# EAGLE board LPmini-Prototype (EAGLE 6.4)
REV: B
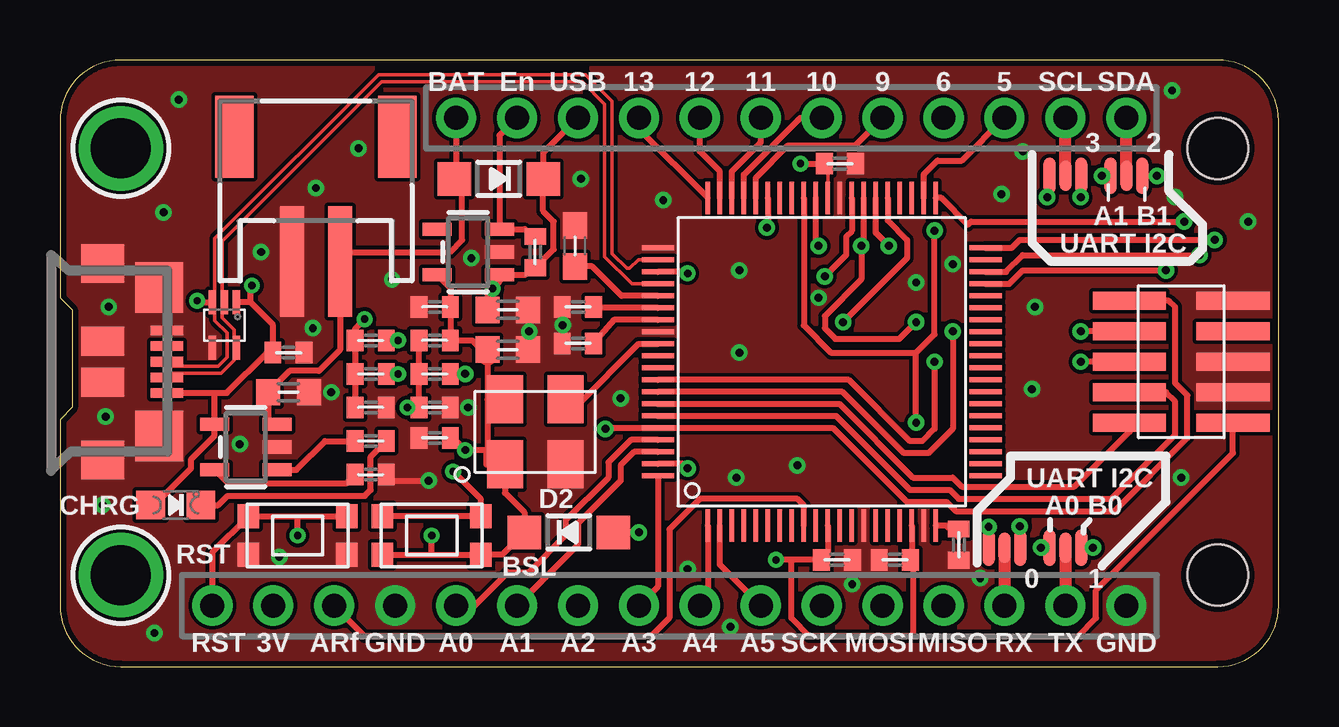
[diagram p0: board, top side]
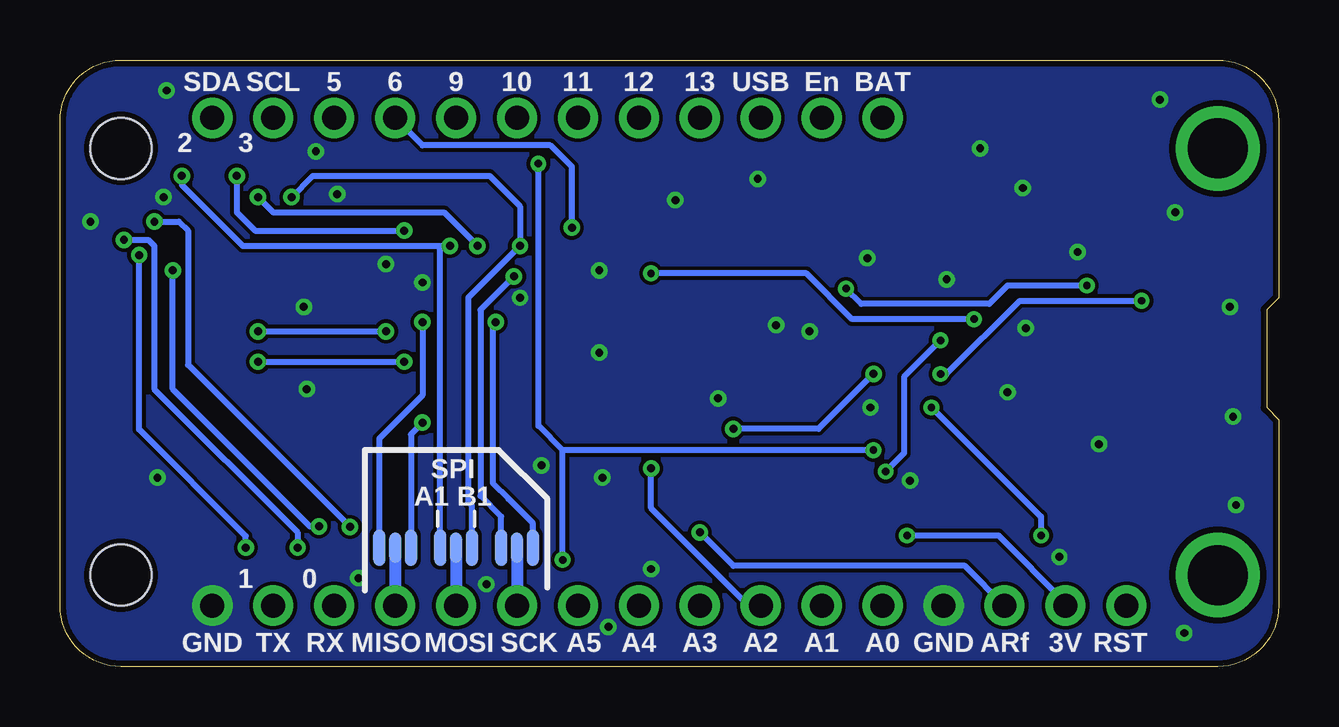
[diagram p1: board, bottom side, seen from below]

Size 50.8 x 25.27 mm. Coordinates in mm from the lower left corner, seen from the top.
Outline: 48.26,0 arc90 50.8,2.54 50.8,22.73 arc90 48.26,25.27 2.54,25.27 arc90 0,22.73 0,15.37 0.51,14.86 0.51,10.79 0,10.29 0,2.54 arc90 2.54,0 48.26,0
Copper layers (1*16): Top 0.0356mm / dielectric 1.5011mm / Bottom 0.0356mm
Design rules "Joseph *": minimum track width 6mil, minimum drill 12mil, track to track 6mil, track to pad 6mil, pad to pad 6mil, via to via 6mil, smd to smd 0mil, copper to edge 10mil, drill to drill 6mil, minimum pad ring 7mil, minimum via ring 7mil, stop-mask expansion 1mil, vias tented up to drill 50mil, thermal gap 6mil
Holes 2.54 mm at 48.26,21.59 48.26,3.81

## Footprints (pad centres in the part's own frame; a part is rotated, then mirrored left to right if it is on the bottom)
PB_KMR2 = smd 0.9 x 1: 1A -2.05,0.8; 1B 2.05,0.8; 2A -2.05,-0.8; 2B 2.05,-0.8
C0402 = smd 0.7 x 0.9: 1 -0.65,0; 2 0.65,0
R0603 = smd 1 x 1.1: 1 -0.85,0; 2 0.85,0
R0402 = smd 0.7 x 0.9: 1 -0.65,0; 2 0.65,0
C0603 = smd 1.1 x 1: 1 -0.85,0; 2 0.85,0
CHIPLED_0805_NOOUTLINE = smd 1.2 x 1.2: A 0,-1.05; C 0,1.05
SOD-123 = smd 1.4 x 1.4: A 1.85,0; C -1.85,0
1X16_ROUND = drill 1 pad 1.676: 1 -19.05,0; 2 -16.51,0; 3 -13.97,0; 4 -11.43,0; 5 -8.89,0; 6 -6.35,0; 7 -3.81,0; 8 -1.27,0; 9 1.27,0; 10 3.81,0; 11 6.35,0; 12 8.89,0; 13 11.43,0; 14 13.97,0; 15 16.51,0; 16 19.05,0
1X12_ROUND = drill 1 pad 1.676: 1 -13.97,0; 2 -11.43,0; 3 -8.89,0; 4 -6.35,0; 5 -3.81,0; 6 -1.27,0; 7 1.27,0; 8 3.81,0; 9 6.35,0; 10 8.89,0; 11 11.43,0; 12 13.97,0
PROJECT7264_TPD2E001-DRL = smd 0.3 x 1: 1 -0.5,-0.95; 2 0,-0.95; 3 0.5,-0.95; 4 0.5,0.95; 5 -0.5,0.95
SOT23-5 = smd 0.55 x 1.2: 1 -0.95,-1.3; 2 0,-1.3; 3 0.95,-1.3; 4 0.95,1.3; 5 -0.95,1.3
SOLDER_JUMPER_3 = smd 0.508 x 1.524: 1 -0.66,0; 2 0.66,0 | smd 0.508 x 1.27: C 0,0
2X05-SMALL_SMD = smd 0.762 x 3.048: 1 -2.54,-2.159; 2 -1.27,-2.159; 3 0,-2.159; 4 1.27,-2.159; 5 2.54,-2.159; 6 2.54,2.159; 7 1.27,2.159; 8 0,2.159; 9 -1.27,2.159; 10 -2.54,2.159
TI_MSP430_V16_INTERN_PN80 = smd 1.35 x 0.2: 1 -6.825,4.75; 2 -6.825,4.25; 3 -6.825,3.75; 4 -6.825,3.25; 5 -6.825,2.75; 6 -6.825,2.25; 7 -6.825,1.75; 8 -6.825,1.25; 9 -6.825,0.75; 10 -6.825,0.25; 11 -6.825,-0.25; 12 -6.825,-0.75; 13 -6.825,-1.25; 14 -6.825,-1.75; 15 -6.825,-2.25; 16 -6.825,-2.75; 17 -6.825,-3.25; 18 -6.825,-3.75; 19 -6.825,-4.25; 20 -6.825,-4.75; 41 6.825,-4.75; 42 6.825,-4.25; 43 6.825,-3.75; 44 6.825,-3.25; 45 6.825,-2.75; 46 6.825,-2.25; 47 6.825,-1.75; 48 6.825,-1.25; 49 6.825,-0.75; 50 6.825,-0.25; 51 6.825,0.25; 52 6.825,0.75; 53 6.825,1.25; 54 6.825,1.75; 55 6.825,2.25; 56 6.825,2.75; 57 6.825,3.25; 58 6.825,3.75; 59 6.825,4.25; 60 6.825,4.75 | smd 0.2 x 1.35: 21 -4.75,-6.825; 22 -4.25,-6.825; 23 -3.75,-6.825; 24 -3.25,-6.825; 25 -2.75,-6.825; 26 -2.25,-6.825; 27 -1.75,-6.825; 28 -1.25,-6.825; 29 -0.75,-6.825; 30 -0.25,-6.825; 31 0.25,-6.825; 32 0.75,-6.825; 33 1.25,-6.825; 34 1.75,-6.825; 35 2.25,-6.825; 36 2.75,-6.825; 37 3.25,-6.825; 38 3.75,-6.825; 39 4.25,-6.825; 40 4.75,-6.825; 61 4.75,6.825; 62 4.25,6.825; 63 3.75,6.825; 64 3.25,6.825; 65 2.75,6.825; 66 2.25,6.825; 67 1.75,6.825; 68 1.25,6.825; 69 0.75,6.825; 70 0.25,6.825; 71 -0.25,6.825; 72 -0.75,6.825; 73 -1.25,6.825; 74 -1.75,6.825; 75 -2.25,6.825; 76 -2.75,6.825; 77 -3.25,6.825; 78 -3.75,6.825; 79 -4.25,6.825; 80 -4.75,6.825
MOUNTINGHOLE_2.5_PLATED = drill 2.5 pad 3.2: P$1 0,0
USB_CON-UPDATE_HIROSE-ZX62R-B-5P = smd 1.35 x 0.4: D+ 2.675,0; D- 2.675,-0.65; GND 2.675,1.3; NC 2.675,0.65; VBUS 2.675,-1.3 | smd 1.778 x 1.6: SHIELD1 0,4.1; SHIELD2 0,-4.1 | smd 2 x 2.1: SHIELD3 2.35,3.1; SHIELD4 2.35,-3.1 | smd 1.778 x 1.2: SHIELD5 0,0.85; SHIELD6 0,-0.85
JSTPH2 = smd 1 x 4.6: 1 -1,-3.7; 2 1,-3.7 | smd 1.6 x 3.4: NC1 -3.4,1.5; NC2 3.4,1.5
SMD_CRYSTAL_3.2X5_PERICOM = smd 1.5 x 2: 1 -1.27,-1.35; 2 1.27,-1.35; 3 1.27,1.35; 4 -1.27,1.35

## Placement (x,y rotation side)
BSL  PB_SMALL_SMD  [PB_KMR2]  15.49,5.46 180 top
C1  .1uF  [C0402]  9.53,13.08 0 top
C3  10µF  [R0603]  9.53,11.43 0 top
C6  10µF  [R0603]  18.67,14.86 0 top
C7  1uF  [R0402]  15.62,14.99 180 top
C8  10µF  [R0603]  18.67,13.21 0 top
C19  .1uF  [C0402]  15.62,10.79 0 top
C20  0.1uF  [C0402]  15.62,9.53 180 top
C21  .1uF  [C0402]  32.51,20.95 0 top
C22  .1uF  [C0402]  32.38,4.45 0 top
C23  .1uF  [C0402]  34.8,4.45 180 top
C24  10uF  [C0603]  21.46,17.53 90 top
C25  .1uF  [C0402]  21.59,14.99 180 top
C26  .1uF  [C0402]  21.59,13.46 180 top
C28  .1uF  [C0402]  37.47,5.08 270 top
CHG  ORANGE  [CHIPLED_0805_NOOUTLINE]  4.83,6.73 270 top
D2  MBR120  [SOD-123]  21.21,5.59 0 top
D4  MBR120  [SOD-123]  18.29,20.32 180 top
JP1  [1X16_ROUND]  25.4,2.54 180 top
JP3  [1X12_ROUND]  30.48,22.86 0 top
R1  1.4k  [R0402]  12.95,12.19 0 top
R2  1K  [R0402]  12.95,9.4 180 top
R3  1M  [R0402]  12.95,10.79 180 top
R4  1k  [R0402]  15.62,12.19 0 top
R5  100  [R0402]  12.95,13.59 0 top
R7  22k  [R0402]  15.62,13.59 180 top
R8  10K\  [R0402]  12.95,8 0 top
R9  100k  [R0402]  19.81,17.27 90 top
RST  PB_SMALL_SMD  [PB_KMR2]  9.91,5.46 180 top
U1  ESD_TPD2E001  [PROJECT7264_TPD2E001-DRL]  6.86,14.22 180 top
U2  SPX3819-3.3  [SOT23-5]  17.02,17.27 90 top
U3  MCP73831T-2ACI/OT  [SOT23-5]  7.75,9.14 90 top
U$2  3PT_SOLDER_JUMPER  [SOLDER_JUMPER_3]  39.37,4.95 180 top
U$4  3PT_SOLDER_JUMPER  [SOLDER_JUMPER_3]  34.29,4.95 0 bottom
U$5  3PT_SOLDER_JUMPER  [SOLDER_JUMPER_3]  36.83,4.95 0 bottom
U$6  3PT_SOLDER_JUMPER  [SOLDER_JUMPER_3]  31.75,4.95 0 bottom
U$7  PINHD_2X05SMD  [2X05-SMALL_SMD]  46.74,12.7 90 top
U$8  3PT_SOLDER_JUMPER  [SOLDER_JUMPER_3]  41.91,4.95 180 top
U$9  3PT_SOLDER_JUMPER  [SOLDER_JUMPER_3]  44.45,20.45 180 top
U$10  3PT_SOLDER_JUMPER  [SOLDER_JUMPER_3]  41.91,20.45 180 top
U$12  TI_MSP430_V16_INTERN_F552X---PN80  [TI_MSP430_V16_INTERN_PN80]  31.75,12.7 90 top
U$31  MOUNTINGHOLE2.5  [MOUNTINGHOLE_2.5_PLATED]  2.54,21.59 270 top
U$32  MOUNTINGHOLE2.5  [MOUNTINGHOLE_2.5_PLATED]  2.54,3.81 270 top
USB1  [USB_CON-UPDATE_HIROSE-ZX62R-B-5P]  1.78,12.7 0 top
X1  JSTPH  [JSTPH2]  10.67,20.57 0 top
X2  16MHZ  [SMD_CRYSTAL_3.2X5_PERICOM]  19.81,9.78 0 top

## Library data of the parts
BSL RST U1 U$2 U$4-U$10 U$12 USB1 X2 = 0Joseph
C1 C3 C6 C7 C19-C26 C28 R1-R5 R7-R9 = rcl
C8 = rcl; COMPANY: ADAFRUIT INDUSTRIES; DRAWN: KTOWN; REV: A
CHG D2 D4 JP1 JP3 U2 U3 X1 = microbuilder
U$31 U$32 = microbuilder; BOM: EXCLUDE

## Nets
5: JP3.10 U$12.42
6: JP3.9 U$12.55
9: JP3.8 U$12.56
10: JP3.7 U$12.57
11: JP3.6 U$12.58
12: JP3.5 U$12.59
13: JP3.4 U$12.60
+5V: C24.1 U$12.65
A0: JP1.12 U$12.77
A0_RX: U$2.2 U$12.41
A0_TX: U$8.2 U$12.40
A1: JP1.11 U$12.78
A1_RX: U$5.2 U$9.2 U$12.52
A1_SCK: U$6.2 U$12.45
A1_TX: U$4.2 U$10.2 U$12.51
A2: JP1.10 U$12.79
A3: JP1.9 U$12.80
A4: JP1.8 U$12.1
A5: JP1.7 U$12.2
B0_SCL: U$8.1 U$12.38
B0_SDA: U$2.1 U$12.37
B1_SCK: U$6.1 U$12.48
B1_SCL: U$5.1 U$10.1 U$12.47
B1_SDA: U$4.1 U$9.1 U$12.46
D_N: U1.2 U1.5 U$12.64 USB1.D-
D_P: R1.2 U1.3 U$12.62 USB1.D+
EN: JP3.2 R9.2 U2.3
GND: C1.2 C3.2 C6.2 C7.2 C8.2 C19.2 C20.2 C21.2 C22.2 C23.2 C24.2 C25.2 C26.2 C28.2 JP1.1 JP1.13 R3.1 R8.2 RST.1A RST.1B U1.4 U2.2 U3.2 U$7.2 U$7.3 U$7.5 U$12.14 U$12.19 U$12.49 U$12.61 U$12.68 USB1.GND USB1.SHIELD1 USB1.SHIELD2 USB1.SHIELD3 USB1.SHIELD4 USB1.SHIELD5 USB1.SHIELD6 X1.1 X2.2
MISO: JP1.4 U$5.C
MOSI: JP1.5 U$4.C
N$1: CHG.C R2.1
N$3: R2.2 U3.1
N$4: R8.1 U3.5
N$5: BSL.2A BSL.2B R5.2
N$6: R1.1 R3.2 R5.1 U$12.63
N$14: U$12.39
N$23: C25.1 U$12.66
N$24: C26.1 U$12.67
N$25: C28.1 U$12.20
N$40: U$12.69 X2.3
RDA: JP1.3 U$2.C
RDB: JP3.12 U$9.C
RST: R4.2 U$7.6 U$12.76
RST_BTN: C19.1 JP1.16 R4.1 R7.2 RST.2A RST.2B
SCK: JP1.6 U$6.C
TCA: JP1.2 U$8.C
TCB: JP3.11 U$10.C
TCK: U$7.9 U$12.75
TDI: U$7.7 U$12.73
TDO: U$7.8 U$12.72
TMS: U$7.10 U$12.74
VBAT: C3.1 D4.A JP3.1 U3.3 X1.2
VBUS: C1.1 C6.1 CHG.A D4.C JP3.3 R9.1 U1.1 U2.1 U3.4 USB1.VBUS
VCC: BSL.1A BSL.1B C7.1 C8.1 C20.1 C21.1 C22.1 C23.1 D2.C JP1.15 R7.1 U2.5 U$7.1 U$12.11 U$12.18 U$12.50 X2.1 X2.4
VREF+: D2.A JP1.14 U$12.9

## Tracks (layer width: path | path; a pad name or v marks a point on that pad's centre or on a via)
5
  Top 0.254: U$12.42 36,20.51 36.58,21.08 37.59,21.08 JP3.10
6  (via drill 0.33)
  Top 0.254: U$12.55 29.5,18.32 v29.46,18.29
  Bottom 0.254: v29.46,18.29 29.46,20.83 30.35,21.72 35.69,21.72 JP3.9
9
  Top 0.254: U$12.56 29,20.36 30.35,21.72 33.15,21.72 JP3.8
10
  Top 0.254: U$12.57 28.5,20.5 30.86,22.86 JP3.7
11
  Top 0.254: U$12.58 28,20.63 29.21,21.84 JP3.6
12
  Top 0.254: U$12.59 27.5,20.63 26.67,21.46 JP3.5
13
  Top 0.254: U$12.60 24.13,22.39 JP3.4
+5V
  Top 0.254: U$12.65 23.41,15.45 22.19,16.68 C24.1
A0
  Top 0.254: U$12.77 23.8,9.45 22.86,8.51 22.86,7.87 21.08,6.1 21.08,5.46 19.56,3.94 18.67,3.94 17.27,2.54 JP1.12
A0_RX  (via drill 0.33)
  Top 0.254: v38.71,5.82 U$2.2 | U$12.41 36.74,19.52 37.85,18.41 37.97,18.54 v46.86,18.54
  Bottom 0.254: v38.71,5.82 45.47,12.57 45.47,18.16 45.85,18.54 v46.86,18.54
A0_TX  (via drill 0.33)
  Top 0.254: U$12.40 39.67,17.45 40.01,17.78 v48.13,17.78 | 41.27,4.98 U$8.2 v40.89,4.95
  Bottom 0.254: v48.13,17.78 47.12,17.78 46.86,17.53 46.86,11.56 40.89,5.59 v40.89,4.95
A1
  Top 0.254: U$12.78 23.94,8.95 23.37,8.38 23.37,7.75 21.59,5.97 21.59,5.08 JP1.11
A1_RX  (via drill 0.33)
  Top 0.254: 35.69,13.08 32.13,13.08 31,14.21 U$12.52 | 35.69,13.08 36.45,13.84 v36.45,18.16 | v35.69,10.16 35.69,13.08 | U$9.2 v43.43,20.45
  Bottom 0.254: 36.2,4.98 U$5.2 36.17,9.68 v35.69,10.16 | v36.45,18.16 42.67,18.16 43.43,18.92 v43.43,20.45
A1_SCK  (via drill 0.33)
  Top 0.254: U$12.45 34.5,18.59 35.31,17.78 35.31,17.02 v32.64,14.35
  Bottom 0.254: U$6.2 31.09,5.97 32.11,6.98 32.77,7.64 32.77,14.22 v32.64,14.35
A1_TX  (via drill 0.33)
  Top 0.254: v31.62,17.53 31.5,17.65 U$12.51 | U$10.2 41.25,19.58 v41.15,19.56
  Bottom 0.254: U$4.2 33.63,6.71 33.78,6.86 33.78,15.37 v31.62,17.53 31.62,19.18 32.89,20.45 40.26,20.45 v41.15,19.56
A2  (via drill 0.33)
  Top 0.254: v26.16,8.26 25.97,8.45 U$12.79
  Bottom 0.254: JP1.10 22.1,2.54 26.16,6.6 v26.16,8.26
A3
  Top 0.254: U$12.80 24.93,3.33 JP1.9
A4
  Top 0.254: U$12.1 27,2.87 JP1.8
A5
  Top 0.254: JP1.7 27.5,4.25 U$12.2
B0_SCL  (via drill 0.33)
  Top 0.254: U$12.38 39.44,16.45 40.13,17.14 v47.5,17.14 | 42.55,4.98 U$8.1 v43.05,4.95
  Bottom 0.254: v47.5,17.14 47.5,9.88 43.05,5.44 v43.05,4.95
B0_SDA  (via drill 0.33)
  Top 0.254: U$12.37 39.57,15.95 40.13,16.51 v46.1,16.51 | U$2.1 40.01,4.98 v40.01,5.84
  Bottom 0.254: v46.1,16.51 46.1,11.56 40.39,5.84 v40.01,5.84
B1_SCK  (via drill 0.33)
  Top 0.254: U$12.48 33,18.14 32.77,17.91 32.77,17.14 v31.88,16.26
  Bottom 0.254: U$6.1 32.41,6.25 33.27,7.11 33.27,14.86 v31.88,16.26
B1_SCL  (via drill 0.33)
  Top 0.254: U$12.47 33.5,17.68 v33.4,17.53 33.4,16.13 31.88,14.61 31.88,14.1 32.32,13.65 34.99,13.65 v35.69,14.35 | U$10.1 42.57,19.58 v42.55,19.56
  Bottom 0.254: v33.4,17.53 34.8,18.92 40.64,18.92 41.91,18.92 v42.55,19.56 | v35.69,14.35 35.69,11.3 37.49,9.5 U$5.1
B1_SDA  (via drill 0.33)
  Top 0.254: v34.54,17.53 34,18.07 U$12.46 | U$9.1 v45.72,20.45
  Bottom 0.254: U$4.1 34.95,17.53 v34.54,17.53 43.18,17.53 45.72,20.07 v45.72,20.45
D_N
  Top 0.152: U$12.64 23.84,15.95 22.71,17.08 22.71,23.43 21.78,24.36 13.4,24.36 6.76,17.72 6.76,15.3 U1.2 6.76,15.2 6.76,14.54 7.26,14.03 7.26,13.39 | USB1.D- 4.62,12.22 6.72,12.22 7.26,12.76 7.26,13.39 | U1.5 7.28,13.4 7.26,13.39
D_P  (via drill 0.3)
  Top 0.152: USB1.D+ 4.63,12.52 6.59,12.52 6.96,12.89 6.96,13.91 6.45,14.41 6.45,15.21 U1.3 6.45,15.3 6.45,17.84 13.27,24.66 21.91,24.66 23.01,23.56 23.01,17.21 23.63,16.59 23.75,16.59 24.11,16.95 U$12.62 | R1.2 v14.1,12.19
  Top 0.254: v5.71,15.24 5.78,15.17 U1.3
  Bottom 0.254: v5.71,15.24 10.79,15.24 13.84,12.19 v14.1,12.19
EN
  Top 0.254: R9.2 19.37,18.22 U2.3 18.32,22.13 JP3.2
GND  (via drill 0.33)
  Top 0.254: R8.2 13.86,7.75 v15.37,7.75
  other vias: 21.72,20.32 20.95,14.22 19.56,13.97 8.38,17.27 10.67,19.94 12.45,21.59 10.54,14.1 33.02,3.43 27.94,1.65 38.35,3.68 40.51,11.56 40.64,14.99 37.21,16.76 46.48,19.56 46.35,24 49.53,18.54 30.73,8.38 28.19,7.87 26.16,4.06 23.37,11.18 28.32,13.08 28.32,16.51 25.15,19.43 4.32,18.92 11.3,11.43 17.02,10.79 7.49,9.27 1.78,6.73 9.14,4.57 17.14,17.02 13.84,16.13 4.95,23.62 3.94,1.4 40.13,21.46 46.74,7.87 2.03,14.99 1.91,10.41 39.24,19.68 35.69,16 31.62,15.37
  pour Top (no thermals): 0,25.27 0,-2.67 50.8,-2.67 50.8,25.27
  pour Bottom (no thermals): 0,-2.67 50.8,-2.67 50.8,25.27 0,25.27
MISO
  Bottom 0.508: U$5.C JP1.4
MOSI
  Bottom 0.508: U$4.C JP1.5
N$1
  Top 0.254: CHG.C 6.6,6.73 6.99,7.11 12.7,7.11 12.95,7.37 12.95,8.75 R2.1
N$3
  Top 0.254: U3.1 9.85,8.19 11.05,9.4 R2.2
N$4
  Top 0.254: R8.1 11.92,7.62 7.02,7.62 U3.5
N$5  (via drill 0.3)
  Top 0.254: BSL.2B BSL.2A 17.54,6.97 v16.38,8.13 | R5.2 v14.1,13.59
  Bottom 0.254: v14.1,13.59 15.62,12.06 15.62,8.89 v16.38,8.13
N$6  (via drill 0.3)
  Top 0.254: R3.2 R1.1 R5.1 12.3,14.08 v12.7,14.48 | v26.16,16.38 26.09,16.45 U$12.63
  Bottom 0.254: v12.7,14.48 17.78,14.48 19.68,16.38 v26.16,16.38
N$23
  Top 0.254: U$12.66 22.33,14.95 C25.1
N$24
  Top 0.254: U$12.67 23.09,14.45 22.24,13.48 C26.1
N$25
  Top 0.152: 36.53,5.84 U$12.20
  Top 0.254: C28.1 37.46,5.38 36.96,5.88 U$12.20
N$40
  Top 0.254: X2.3 21.54,10.88 24.12,13.45 U$12.69
RDA
  Top 0.508: U$2.C JP1.3
RDB
  Top 0.508: U$9.C JP3.12
RST  (via drill 0.33)
  Top 0.254: R4.2 v16.89,12.19 | v22.73,9.91 22.78,9.95 U$12.76 32.21,9.95 35.31,6.86 36.96,6.86 37.34,6.48 43.94,6.48 46.99,9.53 46.99,11.3 46.48,11.81 46.48,14.99 46.23,15.24 U$7.6
  Bottom 0.254: v22.73,9.91 19.18,9.91 v16.89,12.19
RST_BTN  (via drill 0.3)
  Top 0.254: R7.2 R4.1 C19.1 v14.48,10.79 | 6.35,1.96 JP1.16 6.35,4.75 RST.2B 9.91,6.26 | 9.91,6.26 RST.2A | v9.91,5.46 9.91,6.26
  Bottom 0.254: v14.48,10.79 9.94,6.26 | 9.94,6.26 9.91,6.26 | 9.94,6.26 9.91,6.22 v9.91,5.46
SCK
  Bottom 0.508: U$6.C JP1.6
TCA
  Top 0.508: U$8.C JP1.2
TCB
  Top 0.508: U$10.C JP3.11
TCK
  Top 0.254: U$12.75 32.35,10.45 35.43,7.37 37.08,7.37 37.47,6.98 43.81,6.98 46.48,9.65 46.48,11.05 46.1,11.43 U$7.9
TDI  (via drill 0.33)
  Top 0.254: v37.21,13.97 37.21,9.91 36.2,8.89 35.18,8.89 32.62,11.45 U$12.73 | U$7.7 v42.55,13.97
  Bottom 0.254: v42.55,13.97 v37.21,13.97
TDO  (via drill 0.33)
  Top 0.254: v36.45,12.7 36.45,9.91 35.94,9.4 35.43,9.4 32.88,11.95 U$12.72 | U$7.8 v42.55,12.7
  Bottom 0.254: v42.55,12.7 v36.45,12.7
TMS
  Top 0.254: U$12.74 32.48,10.95 35.56,7.87 37.21,7.87 37.59,7.49 42.29,7.49 44.58,9.78 U$7.10
VBAT
  Top 0.254: 15.88,20.32 D4.A | JP3.1 16.51,20.14 D4.A | D4.A 16.76,19.99 16.76,17.78 16.26,17.27 12.06,17.27 X1.2 11.67,13.19 10.79,12.32 9.56,12.32 C3.1 8.68,10.21 U3.3
VBUS  (via drill 0.3)
  Top 0.254: JP3.3 20.14,21.41 D4.C 20.14,18.98 20.57,18.54 20.57,17.38 R9.1 19.37,16.32 U2.1 18.32,16.03 v18.03,15.75 17.82,15.53 C6.1 | USB1.VBUS 6.45,11.4 | 6.45,11.4 6.96,11.4 8.64,13.08 C1.1 8.88,14.24 7.94,15.17 | 7.94,15.17 U1.1 | 7.94,15.17 7.94,15.81 v8,15.88 | 6.45,11.4 U3.4 6.45,9.62 5.46,8.64 5.46,8.26 3.94,6.73 CHG.A
  Bottom 0.254: v8,15.88 11.3,15.88 12.06,15.11 17.4,15.11 v18.03,15.75
VCC  (via drill 0.3)
  Top 0.152: 35.5,4.49 C23.1 | U$12.50 32,20.82 C21.1
  Top 0.254: U$12.11 32,4.58 C22.1 30.48,4.45 | U$12.18 35.5,4.49 | U2.5 16.27,15.77 C7.1 R7.1 17.18,13.59 17.82,12.95 17.82,11.13 | 17.82,11.13 17.82,9.02 17.78,9.02 | 17.78,9.02 v16.89,9.02 16.38,9.53 C20.1 | X2.4 17.82,11.13 | 17.78,9.02 17.78,8.43 X2.1 18.54,7.24 19.36,6.42 D2.C 18.43,4.66 BSL.1A 15.48,4.66 | 30.48,4.45 v29.84,4.45 | v30.86,20.95 C21.1 | 35.56,1.27 35.56,4.33 C23.1 | 35.56,1.27 31.24,1.27 30.48,2.03 30.48,4.45 | U$7.1 48.9,8.89 43.18,3.17 43.18,2.03 42.42,1.27 35.56,1.27 | BSL.1B 15.48,4.66 | 15.48,4.66 15.48,5.45 v15.49,5.46
  Top 0.813: C8.1 17.82,12.95
  Bottom 0.254: 29.84,9.02 30.86,10.03 v30.86,20.95 | v16.89,9.02 29.84,9.02 | v29.84,4.45 29.84,9.02 | v15.49,5.46 11.68,5.46 8.89,2.67 JP1.15
VREF+  (via drill 0.33)
  Top 0.254: U$12.9 31,6.72 30.73,6.98 26.67,6.98 25.4,5.71 25.4,2.03 24.64,1.27 12.7,1.27 JP1.14 | v24.13,5.59 D2.A
  Bottom 0.254: JP1.14 13.08,4.19 22.73,4.19 v24.13,5.59

## Text on the board
tPlace: BAT | En | USB | 13 | 12 | 11 | 10 | 9 | 6 | 5 | SCL | SDA | 3 | 2 | A1 B1 | UART I2C | UART I2C | CHRG | A0 B0 | RST | BSL | 0 | 1 | RST | 3V | ARf | GND | A0 | A1 | A2 | A3 | A4 | A5 | SCK | MOSI | MISO | RX | TX | GND
bPlace: BAT | En | USB | 13 | 12 | 11 | 10 | 9 | 6 | 5 | SCL | SDA | 3 | 2 | SPI | A1 B1 | 0 | 1 | RST | 3V | ARf | GND | A0 | A1 | A2 | A3 | A4 | A5 | SCK | MOSI | MISO | RX | TX | GND